# Altium PCB SpaceDisplayOverheadLED_PCB.PcbDoc
Units mil, origin at the board's own origin, x right, y up, seen from the top; angles counter-clockwise.
Board outline 1220.47 x 1377.95 mil, 2 copper layers (Top Layer, Bottom Layer); 12 components, 10 nets, 38 pads, 13 vias.
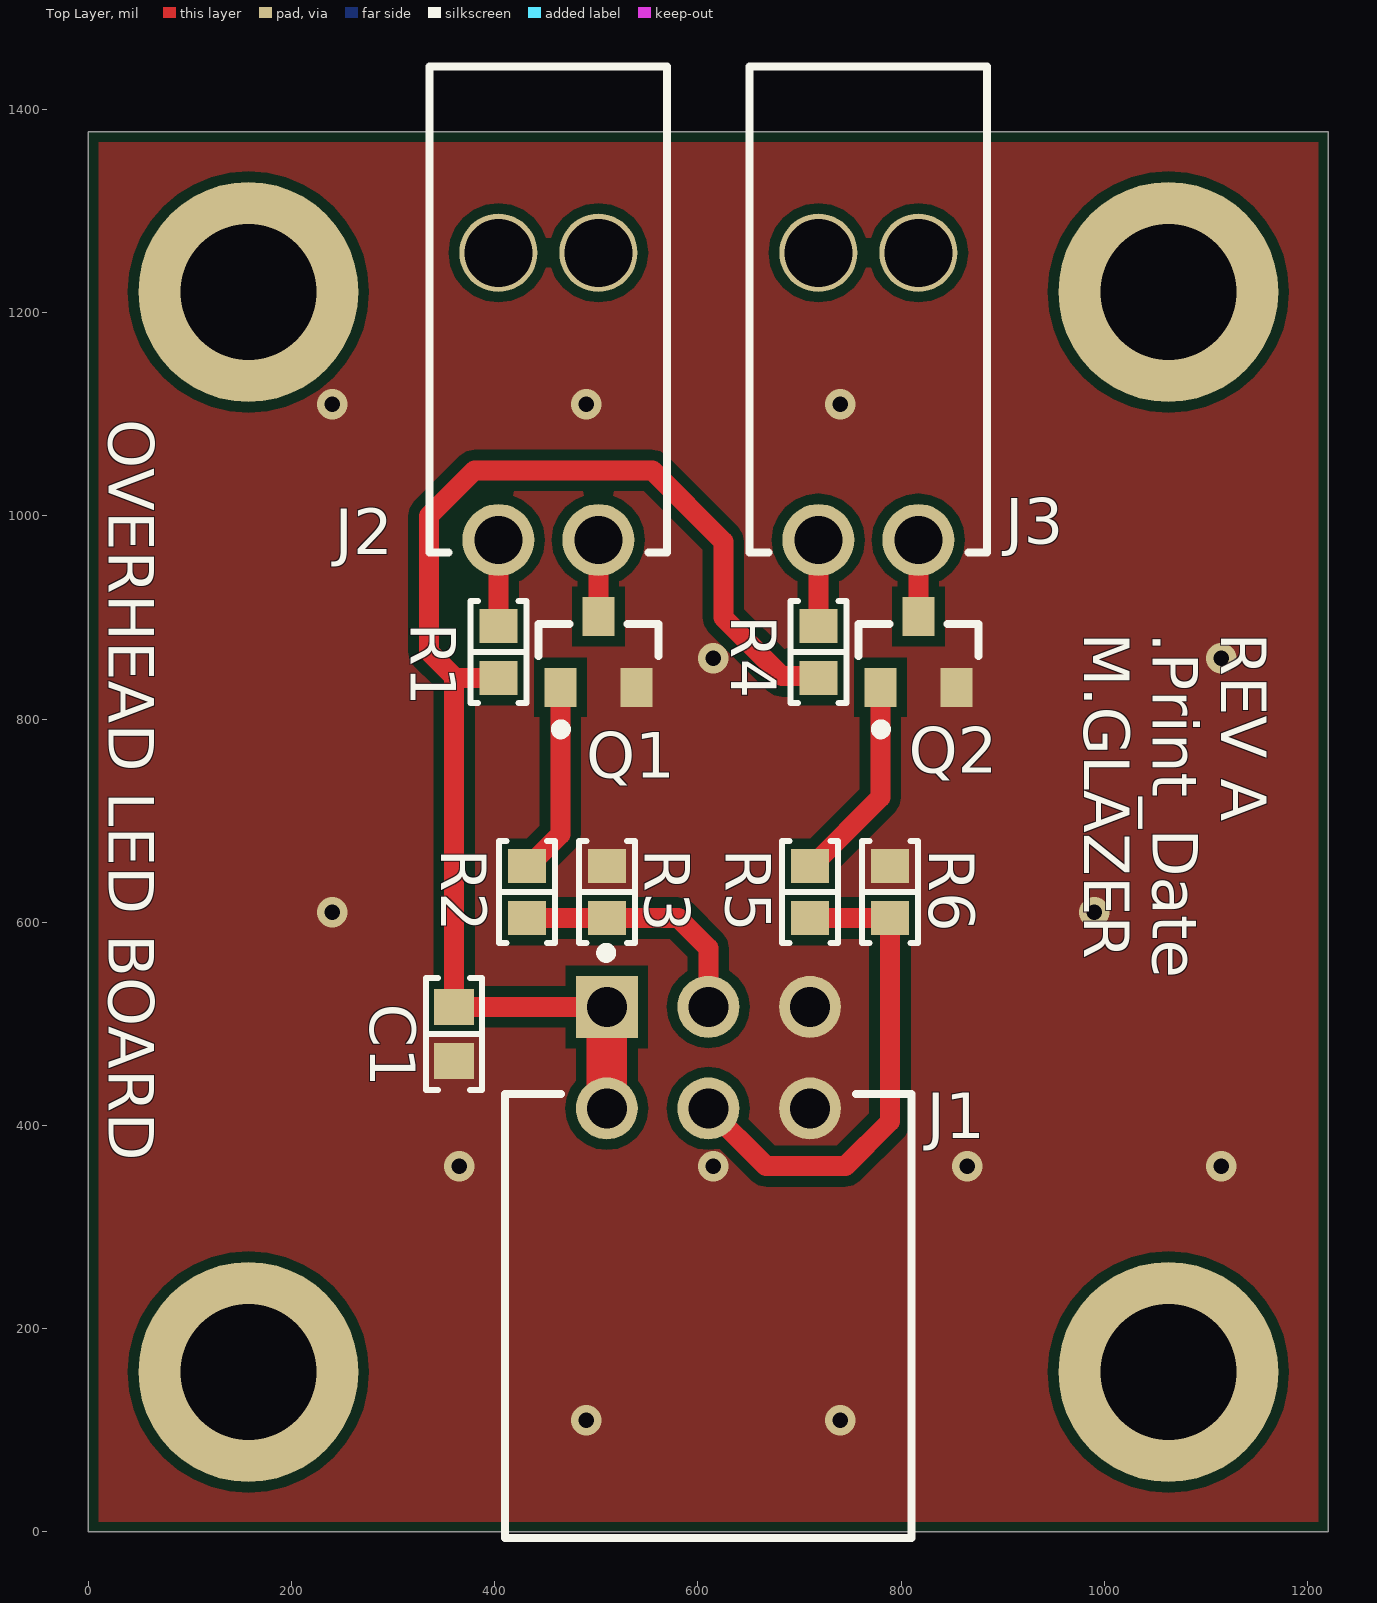
[diagram p0: Top Layer view]
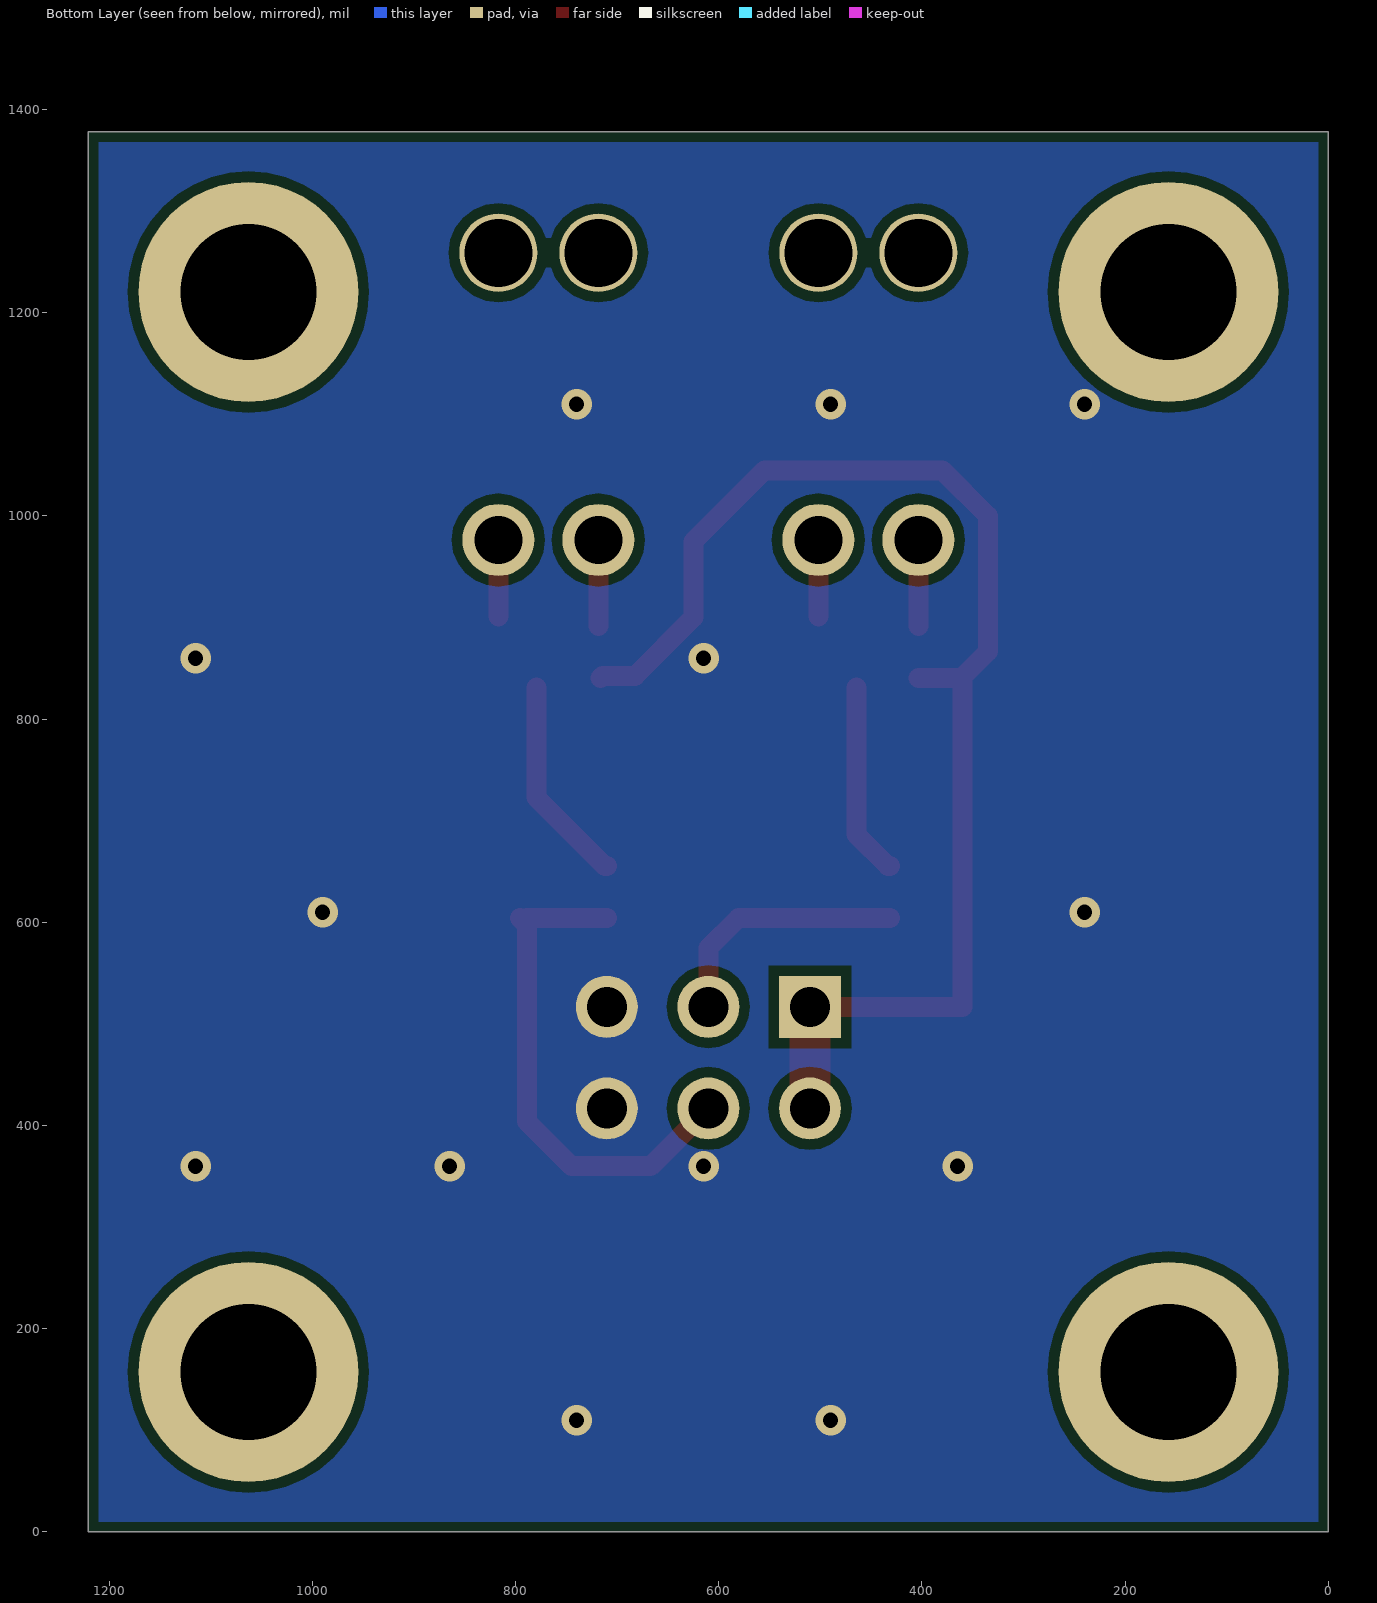
[diagram p1: Bottom Layer view, seen from below]
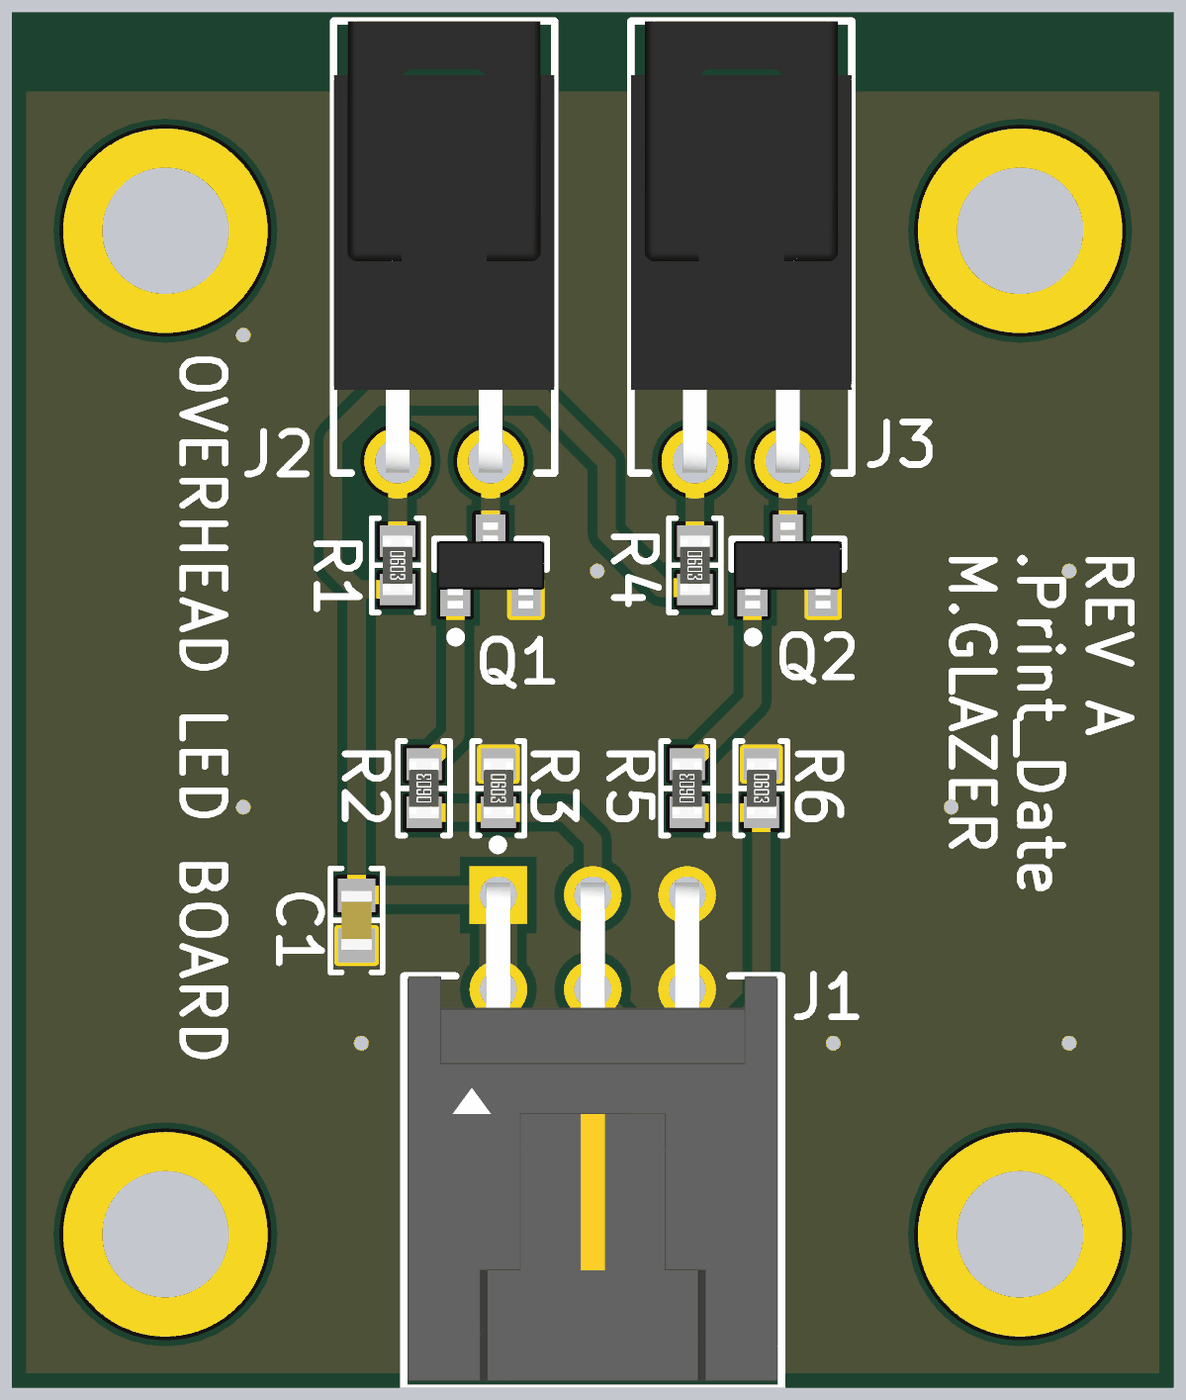
[diagram p2: 3D render of the assembled board from above, using the file's embedded part models]

## Layer stack, top to bottom
Top Solder: solder mask 0.4, Solder Resist, Dk 3.5
Top Layer: signal copper 1.4
Dielectric 1: dielectric 12.6, FR-4, Dk 4.8
Bottom Layer: signal copper 1.4
Bottom Solder: solder mask 0.4, Solder Resist, Dk 3.5

## Board outline
0,0 0,1377.95 1220.47,1377.95 1220.47,0

## Design rules (kind name [scope] priority, off if disabled: settings)
BoardOutlineClearance [All] p1: gap=10 ignorepadtopadclearanceinfootprint=FALSE
Clearance [All] p1: gap=10 ignorepadtopadclearanceinfootprint=FALSE
HoleSize [All] p1: absolutevalues=TRUE maxlimit=250 minlimit=10 maxpercent=80.000 minpercent=20.000
MinimumAnnularRing [All] p1: minimumring=5
MinimumSolderMaskSliver [All] p1: minsoldermaskwidth=1
PolygonConnect [All] p1: connectstyle=Direct reliefconductorwidth=20 reliefentries=4 polygonreliefangle="90 Angle" airgapwidth=10
RoutingVias [All] p1: holewidth=28 width=50 viastyle="Through Hole" minholewidth=28 minwidth=50 maxholewidth=28 maxwidth=50
SilkToSilkClearance [All] p1: silktosilkclearance=1
SilkToSolderMaskClearance [IsPad] p1: minsilkscreentomaskgap=1 clearancetoexposedcopper=TRUE
SolderMaskExpansion [All] p1: expansion=4 istentingtop=FALSE
SupplyNets "Schematic Supply Nets_1" [InNet('+5V')] p1: voltage=0.000
SupplyNets "Schematic Supply Nets" [InNet('GND')] p2: voltage=0.000
Width [All] p1: maxlimit=500 minlimit=10 preferedwidth=10
26 further rules are at their usual default settings.

## Components (designator, comment, footprint, x,y, rotation, side; value= is the part's Value field where it differs from the comment)
C1 "1 µF" "CAP 0603_1608" 360,490 r90 top
J1 "90130-3206" FP-90130-3206-MFG 610.24,216.54 r0 top locked
J2 "1053131102" "MOLEX 1053131102" 452.76,1220.47 r0 top locked
J3 "1053131102" "MOLEX 1053131102" 767.72,1220.47 r0 top locked
Q1 "SN7002NH6327XTSA2" "INFINEON SOT-23-3" 501.97,866.14 r90 top
Q2 "SN7002NH6327XTSA2" "INFINEON SOT-23-3" 816.93,866.14 r90 top locked
R1 "220 Ohms" "RES 0603_1608" 403.54,866.14 r270 top
R2 "10 Ohms" "RES 0603_1608" 431.5,629.92 r90 top
R3 "10 kOhms" "RES 0603_1608" 510.24,629.92 r270 top
R4 "220 Ohms" "RES 0603_1608" 718.5,866.14 r270 top
R5 "10 Ohms" "RES 0603_1608" 710.24,629.92 r90 top
R6 "10 kOhms" "RES 0603_1608" 788.98,629.92 r270 top

## Footprints (in the part's own frame and the unit in brackets; to place one, negate y for a bottom-side part, rotate by r counter-clockwise, add the part's x,y. Pads: shape width x height; smd on the part's side, far side on the other; paste and mask are expansions set on the pad)
"CAP 0603_1608" [mm] "Chip Capacitor, 2-Leads, Body 1.60x0.80mm, IPC Medium Density"
  rect 0.9x1 smd: 1(-0.675,0) 2(0.675,0)
  silkscreen extent -1.4,-0.7 1.4,0.7, body extent -0.8,-0.41 0.8,0.41, height 0.82
FP-90130-3206-MFG [mm]
  rect 1.55x1.55 hole 1 paste-2539.97 mask+0: 1(-2.54,7.628)
  round 1.55 hole 1 paste-2539.97 mask+0: 2(-2.54,5.088) 3(0,7.628) 4(0,5.088) 5(2.54,7.628) 6(2.54,5.088)
  silkscreen extent -5.08,-5.65 5.08,9.1, body extent -5.18,-5.75 5.18,8.5, height 0.25
"INFINEON SOT-23-3" [mm] "SOT23, 3-Leads, Body 2.90x2.40mm, Pitch 0.95mm, IPC Medium Density"
  rect 0.972x0.802 smd: 1(-0.885,0.95) 2(-0.885,-0.95) 3(0.885,0)
  silkscreen extent -2.06,-1.5 0.7,1.5, body extent -1.16,-1.45 1.16,1.45, height 1
"MOLEX 1053131102" [mm] "Connector Header Through Hole, Right Angle 2 position, 2mm Pitch, 5.94x8.64 mm Body"
  round 1.8 hole 1.2: 1(-1.25,-6.2) 2(1.25,-6.2)
  round 1.954 hole 1.7: SH(-1.25,0.98) SH(1.25,0.98)
  silkscreen extent -2.97,-6.52 2.97,5.64, body extent -2.97,-6.52 2.97,5.64, height 6.64
"RES 0603_1608" [mm] "Chip Resistor, 2-Leads, Body 1.60x0.80mm, IPC Medium Density"
  rect 0.85x0.95 smd: 1(-0.65,0) 2(0.65,0)
  silkscreen extent -1.27,-0.7 1.27,0.7, body extent -0.8,-0.4 0.8,0.4, height 0.45

## Part data
C1: library part CL10A105KA8NNNC, "CAP CER 1UF 25V X5R 0603", Device Package="0603 (1608 Metric)", manufacturer="Samsung Electro-Mechanics", Operating Temperature="-55°C ~ 85°C", Supplier Part Number 1=1276-1102-1-ND, Temperature Coefficient=X5R, Tolerance=±10%, Voltage - Rated=25V, Applications="General Purpose", Capacitance="1 µF", componentlink1description=Datasheet, componentlink1url=http://www.samsungsem.com/kr/support/product-search/mlcc/CL10A105KA8NNNC.jsp, componentlink2description="DigiKey Link", componentlink2url=https://www.digikey.com/en/products/detail/samsung-electro-mechanics/CL10A105KA8NNNC/3886760, lastupdated="2/9/2024 8:10:26 PM", Lifecycle Status=Active, Minimum Order=1, Mounting Type="Surface Mount, MLCC", Package / Case="0603 (1608 Metric)", Packaging=TapeAndReel, Part Number=CL10A105KA8NNNC, Part Status=Active, partid=5508, price=0.01, series=CL, Size / Dimension="0.063\" L x 0.031\" W (1.60mm x 0.80mm)", Supplier 1=DigiKey, Thickness (Max)="0.035\" (0.90mm)"
J1: library part CMP-00257-00655632-1, "90130-3206 Conn Shrouded Header (4 Sides) HDR 6 POS 2.54mm Solder RA Thru-Hole C-Grid III™ Frame", Color=Black, Contact Resistance=20mΩ, Current Rating=3A, Insulation Resistance=5GΩ, Manufacturer Lifecycle Status=ACTIVE, Max Operating Temperature=125°C, Max Voltage Rating (DC)=350.35kV, Min Operating Temperature=-55°C, Voltage Rating=350V, Contact Gender=Male, Contact Material="Brass, Copper", Contact Plating=Gold, Country of Origin=SK, Gender=Male, Glow Wire Compliant=Non-compliant, Housing Color=Black, Housing Material=Polyester, Lead Free="Lead Free", Lead Length=2.9mm, Lead Pitch=2.54mm, Lifecycle Status=Production, Material="Glass, Polyester", Mating Post Length=6.75mm, Mount="Through Hole", NexarPartId=655632, Number of Circuits=6, Number of Contacts=6, Number of Poles=6, Number of Positions=6, Number of Rows=2, Orientation="Right Angle", Pitch=2.54mm, Plating=Tin, Radiation Hardening=No, REACH SVHC=Unknown, RoHS=Compliant, Row Spacing=2.54mm, Schedule B="8536694040, 8536694040", Termination="Through Hole", Voltage Rating (AC)=350V, Voltage Rating (DC)=350V, Working Voltage=350V
J2 J3: "CONN HEADER R/A 2POS 2.5MM", Insulation Color=Black, manufacturer=Molex, Operating Temperature="-40°C ~ 105°C", Supplier Part Number 1=WM16893-ND, componentlink1description=Datasheet, componentlink1url=https://www.molex.com/pdm_docs/ps/PS-105300-100-001.pdf, componentlink2description="DigiKey Link", componentlink2url=http://digikey.com/product-detail/en/molex/1053131102/WM16893-ND/7693174, Connector Type=Header, Contact Finish - Mating=Tin, Contact Finish - Post=Tin, Contact Finish Thickness - Mating="59.0µin (1.50µm)", Contact Length - Post="0.126\" (3.20mm)", Contact Material=Brass, Contact Shape=Square, Contact Type="Male Pin", Fastening Type="Latch Holder", Features="Board Guide", Insulation Height="0.149\" (3.78mm)", Insulation Material="Liquid Crystal Polymer (LCP)", lastupdated="8/11/2022 9:47:25 AM", Lifecycle Status=Active, Minimum Order=1, Mounting Type="Through Hole, Right Angle", Number of Positions=2, Number of Positions Loaded=All, Number of Rows=1, Packaging=Tray, Part Number=1053131102, Part Status=Active, partid=141, Pitch - Mating="0.098\" (2.50mm)", price=0.83, Row Spacing - Mating="-40°C ~ 105°C", series="Nano-Fit 105313", Shrouding="Shrouded - 4 Wall", Style="Board to Cable/Wire", Supplier 1=DigiKey, Termination=Solder
Q1 Q2: "MOSFET N-CH 60V 200MA SOT23-3", Current - Continuous Drain (Id) @ 25°C="200mA (Ta)", Drain to Source Voltage (Vdss)="60 V", Drive Voltage (Max Rds On,  Min Rds On)="4.5V, 10V", Input Capacitance (Ciss) (Max) @ Vds="45 pF @ 25 V", manufacturer="Infineon Technologies", Operating Temperature="-55°C ~ 150°C (TJ)", Package / Case="TO-236-3, SC-59, SOT-23-3", Power Dissipation (Max)="360mW (Ta)", Supplier Device Package=PG-SOT23, Supplier Part Number 1=SN7002NH6327XTSA2CT-ND, componentlink1description=Datasheet, componentlink1url=https://www.infineon.com/dgdl/SN7002N_Rev2.6_.pdf?folderId=db3a3043156fd573011622e10b5c1f67&fileId=db3a304330f6860601311934e76045d5, componentlink2description="DigiKey Link", componentlink2url=https://www.digikey.com/en/products/detail/infineon-technologies/SN7002NH6327XTSA2/6164410, FET Type=N-Channel, Gate Charge (Qg) (Max) @ Vgs="1.5 nC @ 10 V", lastupdated="6/3/2024 8:15:23 PM", Lifecycle Status=Active, Minimum Order=1, Mounting Type="Surface Mount", Packaging=TapeAndReel, Part Number=SN7002NH6327XTSA2, Part Status=Active, price=0.04, Rds On (Max) @ Id, Vgs="5Ohm @ 500mA, 10V", series=SIPMOS®, Supplier 1=DigiKey, Technology="MOSFET (Metal Oxide)", Vgs (Max)=±20V, Vgs(th) (Max) @ Id="1.8V @ 26µA"
R1 R4: library part RMCF0603FT220R, "RES 220 OHM 1% 1/10W 0603", Device Package="0603 (1608 Metric)", manufacturer="Stackpole Electronics Inc", Operating Temperature="-55°C ~ 155°C", Power (Watts)="0.1W, 1/10W", Ratings=AEC-Q200, Supplier Device Package=0603, Supplier Part Number 1=RMCF0603FT220RCT-ND, Temperature Coefficient=±100ppm/°C, Tolerance=±1%, componentlink1description=Datasheet, componentlink1url=https://www.seielect.com/catalog/sei-rmcf_rmcp.pdf, componentlink2description="DigiKey Link", componentlink2url=https://www.digikey.com/en/products/detail/stackpole-electronics-inc/RMCF0603FT220R/1760809, Composition="Thick Film", Features="Automotive AEC-Q200", Height - Seated (Max)="0.022\" (0.55mm)", lastupdated="2/9/2024 8:43:32 PM", Lifecycle Status=Active, Minimum Order=1, Number of Terminations=2, Package / Case="0603 (1608 Metric)", Packaging=CutTape, Part Number=RMCF0603FT220R, Part Status=Active, partid=6086, price=0.01, Resistance="220 Ohms", series=RMCF, Size / Dimension="0.061\" L x 0.031\" W (1.55mm x 0.80mm)", Supplier 1=DigiKey
R2 R5: library part RMCF0603FT10R0, "RES 10 OHM 1% 1/10W 0603", Device Package="0603 (1608 Metric)", manufacturer="Stackpole Electronics Inc", Operating Temperature="-55°C ~ 155°C", Power (Watts)="0.1W, 1/10W", Ratings=AEC-Q200, Supplier Device Package=0603, Supplier Part Number 1=RMCF0603FT10R0CT-ND, Temperature Coefficient=±100ppm/°C, Tolerance=±1%, componentlink1description=Datasheet, componentlink1url=https://www.seielect.com/catalog/sei-rmcf_rmcp.pdf, componentlink2description="DigiKey Link", componentlink2url=https://www.digikey.com/en/products/detail/stackpole-electronics-inc/RMCF0603FT10R0/1761152, Composition="Thick Film", Features="Automotive AEC-Q200", Height - Seated (Max)="0.022\" (0.55mm)", lastupdated="2/9/2024 8:43:32 PM", Lifecycle Status=Active, Minimum Order=1, Number of Terminations=2, Package / Case="0603 (1608 Metric)", Packaging=CutTape, Part Number=RMCF0603FT10R0, Part Status=Active, partid=6083, price=0.01, Resistance="10 Ohms", series=RMCF, Size / Dimension="0.061\" L x 0.031\" W (1.55mm x 0.80mm)", Supplier 1=DigiKey
R3 R6: library part RMCF0603FT10K0, "RES 10K OHM 1% 1/10W 0603", Device Package="0603 (1608 Metric)", manufacturer="Stackpole Electronics Inc", Operating Temperature="-55°C ~ 155°C", Power (Watts)="0.1W, 1/10W", Ratings=AEC-Q200, Supplier Device Package=0603, Supplier Part Number 1=RMCF0603FT10K0CT-ND, Temperature Coefficient=±100ppm/°C, Tolerance=±1%, componentlink1description=Datasheet, componentlink1url=https://www.seielect.com/catalog/sei-rmcf_rmcp.pdf, componentlink2description="DigiKey Link", componentlink2url=https://www.digikey.com/en/products/detail/stackpole-electronics-inc/RMCF0603FT10K0/1761235, Composition="Thick Film", Features="Automotive AEC-Q200", Height - Seated (Max)="0.022\" (0.55mm)", lastupdated="2/9/2024 8:42:00 PM", Lifecycle Status=Active, Minimum Order=1, Number of Terminations=2, Package / Case="0603 (1608 Metric)", Packaging=CutTape, Part Number=RMCF0603FT10K0, Part Status=Active, partid=25663, price=0.01, Resistance="10 kOhms", series=RMCF, Size / Dimension="0.061\" L x 0.031\" W (1.55mm x 0.80mm)", Supplier 1=DigiKey

## Free pads (board coordinates)
  round 216.54 hole 133.86: 2(157.48,157.48) 2(157.48,1220.47) 2(1062.99,157.48) 2(1062.99,1220.47)

## Via types
v1: diameter 30, hole 15, Top Layer to Bottom Layer, tented both sides, 13 vias

## Nets (pads, with @x,y where several pads share a name; then routed paths per layer and width w, separated by ;. In a path a pad name is that pad's centre, name@x,y a point inside that pad or via, vN(x,y) a via of type N, cw(c..) or ccw(c..) an arc to the next point about the centre after c; other vN are vias at no path point)
+5V: C1.2 J1.1 J1.2 R1.2 R4.2 | length 1316.6
  Top Layer w19.68: 361.05,840.55 335,866.61 335,1000 380,1045 555,1045 625,975 625,900 682.57,842.43 714.65,842.43 R4.2@716.54,840.55 ; R1.2 360.55,840.55 360,840 C1.2 360.28,516.85 J1.1
  Top Layer w40: J1.2 J1.1
GND: C1.1 J1.5 J1.6 Q1.2 Q2.2 R3.1 R6.1
  other v1: 490,110 740,110 365,360 615,360 865,360 1115,360 240,610 990,610 615,860 1115,860 240,1110 490,1110 740,1110
LED1_CTRL: J1.3 R2.1 R3.2 | length 248.9
  Top Layer w19.68: R2.1 R3.2 580.67,604.33 610.24,574.76 J1.3
LED2_CTRL: J1.4 R5.1 R6.2 | length 502.5
  Top Layer w19.68: J1.4 667.09,360 745,360 788.98,403.98 788.98,597.44 R6.2@795.87,604.33 ; R5.1 R6.2
NetJ2_1: J2.1 R1.1 | length 84.6
  Top Layer w19.68: R1.1 J2.1
NetJ2_2: J2.2 Q1.3 | length 75.4
  Top Layer w19.68: Q1.3 J2.2
NetJ3_1: J3.1 R4.1 | length 84.6
  Top Layer w19.68: R4.1 J3.1
NetJ3_2: J3.2 Q2.3 | length 75.4
  Top Layer w19.68: Q2.3 J3.2
NetQ1_1: Q1.1 R2.2 | length 190.6
  Top Layer w19.68: R2.2 433.46,655.51 464.57,686.61 Q1.1
NetQ2_1: Q2.1 R5.2 | length 205.6
  Top Layer w19.68: R5.2 712.2,655.51 779.53,722.83 Q2.1
pads on no net: J2.SH J3.SH

## Polygon pours and split planes (outlines as drawn)
GND on Top Layer "GND_L01_P000" (solid, remove dead copper, pour order 0): 0,0 0,1377.95 1220.47,1377.95 1220.47,0
GND on Bottom Layer "GND_L02_P001" (solid, remove dead copper, pour order 1): 0,0 0,1377.95 1220.47,1377.95 1220.47,0

## Silkscreen, mask and mechanical layers (free items; w line width, h text height)
Top Overlay:
  text "OVERHEAD LED BOARD" at 20,1095 h45 r270
  text "REV A / .Print_Date / M.GLAZER" at 980,885 h45 r270
Board:
  the board outline again, w10